# EAGLE board StepUp (EAGLE 6.5.0)
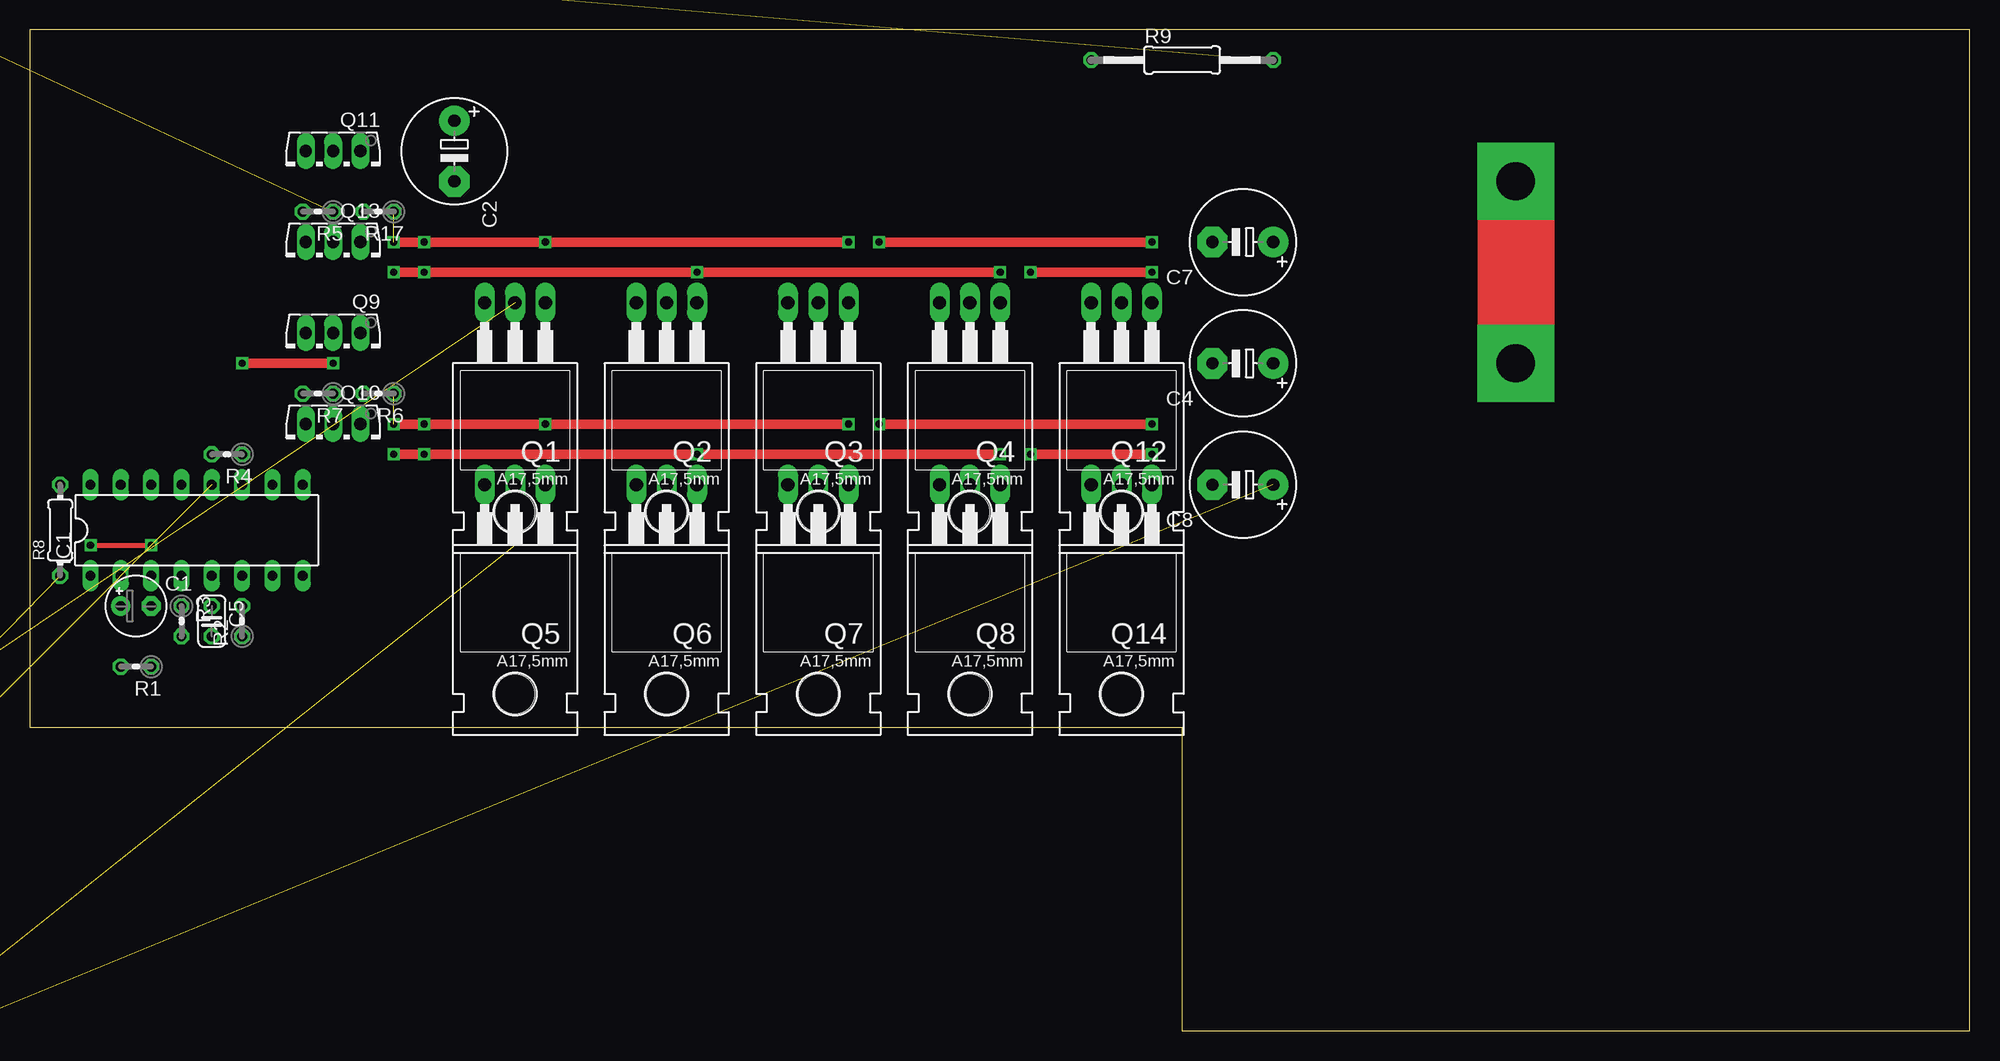
[diagram p0: board, top side]
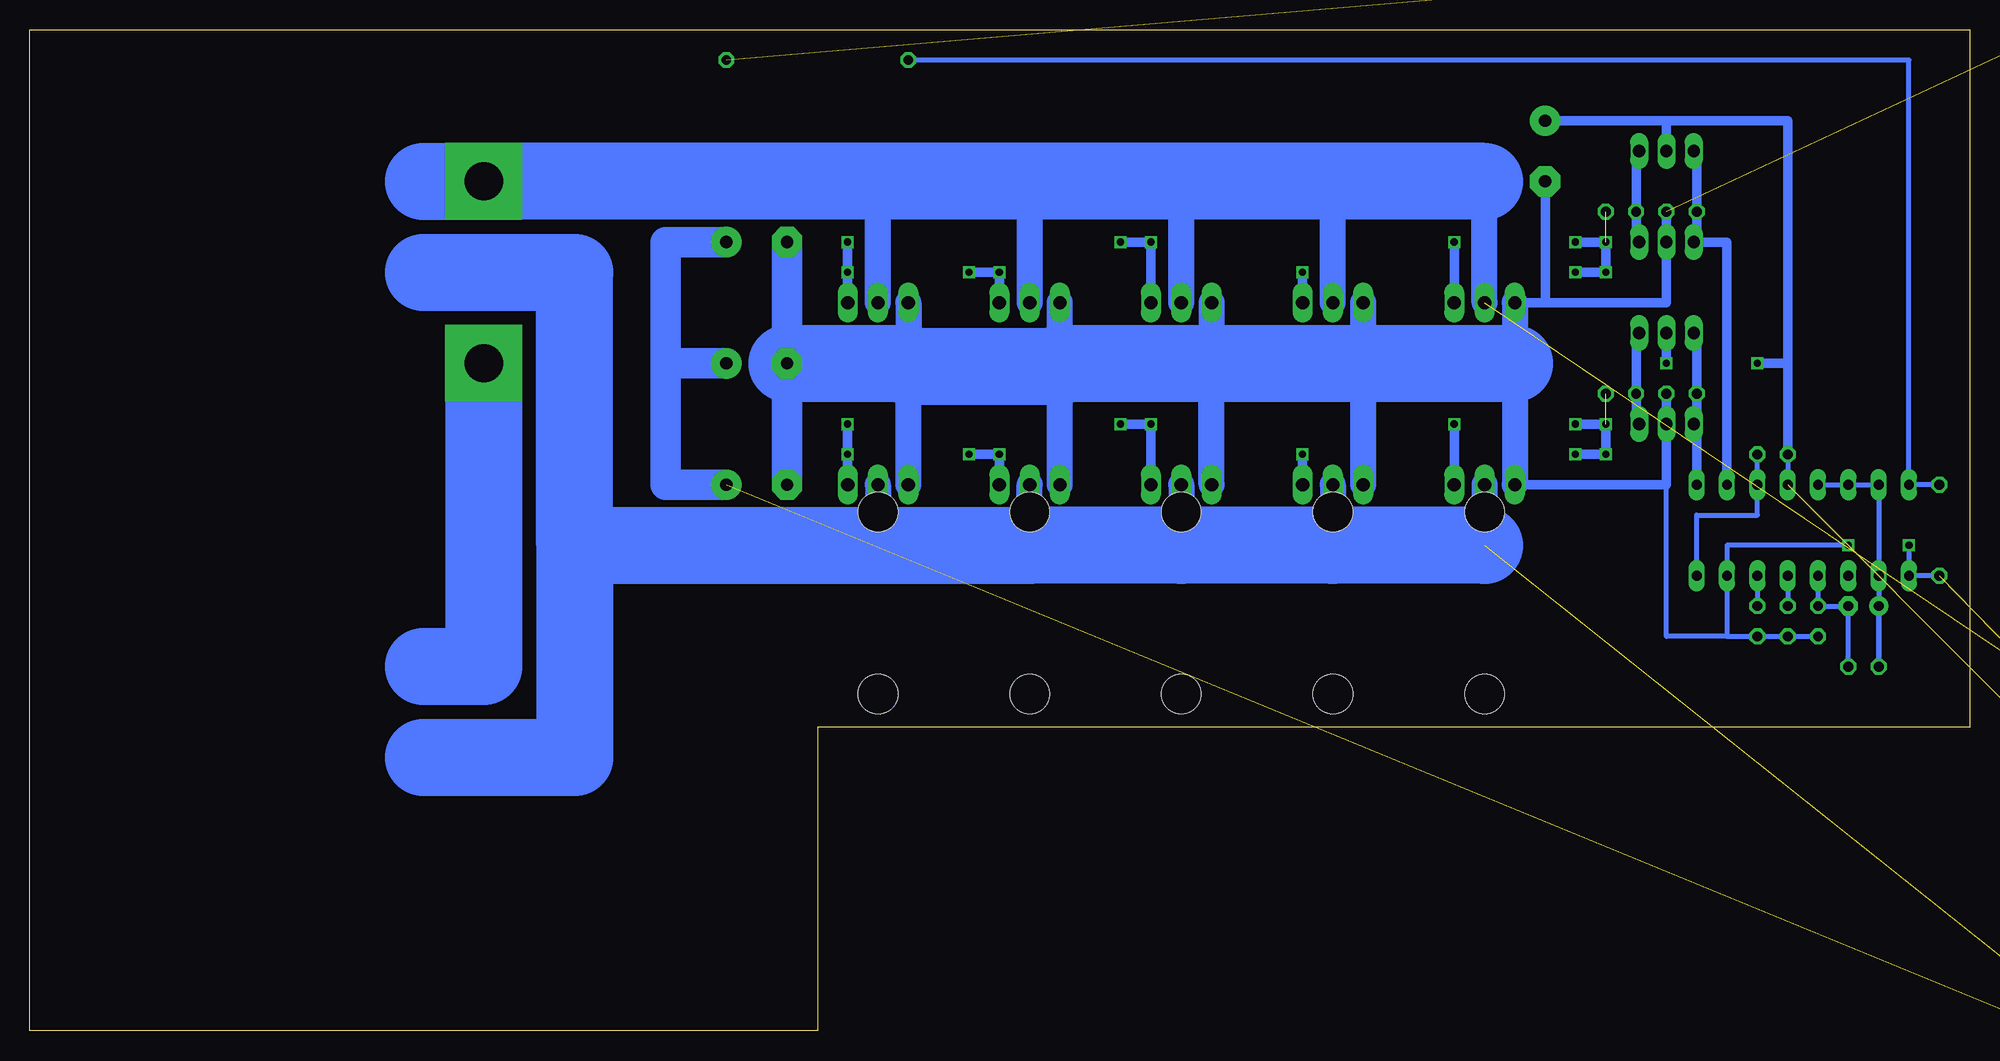
[diagram p1: board, bottom side, seen from below]

Size 162.48 x 83.81 mm. Coordinates in mm from the lower left corner, seen from the top.
Outline: 0,25.4 96.52,25.4 96.52,0 162.48,0 162.48,83.81 0,83.81 0,25.4
Copper layers (1*16): Top 0.035mm / dielectric 1.5mm / Bottom 0.035mm
Design rules "default": minimum track width 10mil, minimum drill 24mil, track to track 8mil, track to pad 8mil, pad to pad 8mil, via to via 8mil, smd to smd 8mil, copper to edge 40mil, drill to drill 8mil, minimum pad ring 10mil, minimum via ring 8mil, stop-mask expansion 4mil, vias tented up to drill 0mil, thermal gap 10mil

## Footprints (pad centres in the part's own frame; a part is rotated, then mirrored left to right if it is on the bottom)
E2,5-5 = drill 0.813 pad 1.6: + -1.27,0 | drill 0.813 pad 1.6 octagon: - 1.27,0
E5-8,5 = drill 1.016 pad 2.54: + -2.54,0 | drill 1.016 pad 2.54 octagon: - 2.54,0
E3,5-8 = drill 0.813 pad 1.6: + -1.778,0 | drill 0.813 pad 1.6 octagon: - 1.778,0
C025-024X044 = drill 0.813 octagon: 1 -1.27,0; 2 1.27,0
TO220ACS = drill 1.016 long: A 2.54,-2.54; C -2.54,-2.54
DIL16 = drill 0.813 long: 1 -8.89,-3.81; 2 -6.35,-3.81; 3 -3.81,-3.81; 4 -1.27,-3.81; 5 1.27,-3.81; 6 3.81,-3.81; 7 6.35,-3.81; 8 8.89,-3.81; 9 8.89,3.81; 10 6.35,3.81; 11 3.81,3.81; 12 1.27,3.81; 13 -1.27,3.81; 14 -3.81,3.81; 15 -6.35,3.81; 16 -8.89,3.81
6000-XXXX-RC = drill 0.9 pad 1.422: 1 -2.5,0; 2 2.5,0
TO220BH = drill 1.118 long: D 0,-6.35; G -2.54,-6.35; S 2.54,-6.35 | hole 3.302: 0,11.176
TO126AV = drill 1.016 long: B 2.286,-1.27; C 0,-1.27; E -2.286,-1.27
0204V = drill 0.813 octagon: 1 -1.27,0; 2 1.27,0
0204/7 = drill 0.813 octagon: 1 -3.81,0; 2 3.81,0
0207/15 = drill 0.813 octagon: 1 -7.62,0; 2 7.62,0
MA03-1 = drill 1.016 long: 1 -2.54,0; 2 0,0; 3 2.54,0
FL02-08 = drill 1.194 pad 3.175 octagon: 1 -17.501,17.501; 2 -17.501,7.518; 3 -17.501,-7.518; 4 -17.501,-17.501; 5 17.501,-17.501; 6 17.501,-12.497; 7 17.501,12.497; 8 17.501,17.501 | hole 4.115: 23.749,18.745; 23.749,-18.745; -23.749,-18.745; -23.749,18.745

## Placement (x,y rotation side)
C1  10µ  [E2,5-5]  8.89,35.56 0 top
C2  1000µ  [E5-8,5]  35.56,73.66 270 top
C3  [E3,5-8]  -27.94,92.71 0 top  (outside the outline)
C4  3300µ  [E5-8,5]  101.6,55.88 180 top
C5  1n  [C025-024X044]  15.24,34.29 270 top
C6  [E3,5-8]  -50.8,92.71 0 top  (outside the outline)
C7  3300µ  [E5-8,5]  101.6,66.04 180 top
C8  3300µ  [E5-8,5]  101.6,45.72 180 top
C9  [E3,5-8]  -85.09,92.71 0 top  (outside the outline)
D4  BYT08P  [TO220ACS]  -39.37,85.09 0 top  (outside the outline)
D5  BYT08P  [TO220ACS]  -50.8,85.09 0 top  (outside the outline)
D6  BYT08P  [TO220ACS]  -62.23,85.09 0 top  (outside the outline)
D7  BYT08P  [TO220ACS]  -73.66,85.09 0 top  (outside the outline)
IC1  TL494CN  [DIL16]  13.97,41.91 0 top
L2  10µ  [6000-XXXX-RC]  -93.98,-52.58 0 top  (outside the outline)
Q1  IRFZ48Z  [TO220BH]  40.64,54.61 180 top
Q2  IRFZ48Z  [TO220BH]  53.34,54.61 180 top
Q3  IRFZ48Z  [TO220BH]  66.04,54.61 180 top
Q4  IRFZ48Z  [TO220BH]  78.74,54.61 180 top
Q5  IRFZ48Z  [TO220BH]  40.64,39.37 180 top
Q6  IRFZ48Z  [TO220BH]  53.34,39.37 180 top
Q7  IRFZ48Z  [TO220BH]  66.04,39.37 180 top
Q8  IRFZ48Z  [TO220BH]  78.74,39.37 180 top
Q9  BD139  [TO126AV]  25.4,57.15 180 top
Q10  BD140  [TO126AV]  25.4,49.53 180 top
Q11  BD139  [TO126AV]  25.4,72.39 180 top
Q12  IRFZ48Z  [TO220BH]  91.44,54.61 180 top
Q13  BD140  [TO126AV]  25.4,64.77 180 top
Q14  IRFZ48Z  [TO220BH]  91.44,39.37 180 top
R1  6,8k  [0204V]  8.89,30.48 180 top
R2  16k  [0204V]  17.78,34.29 90 top
R3  750  [0204V]  12.7,34.29 270 top
R4  22  [0204V]  16.51,48.26 180 top
R5  470  [0204V]  24.13,68.58 180 top
R6  1  [0204V]  29.21,53.34 180 top
R7  470  [0204V]  24.13,53.34 180 top
R8  27k  [0204/7]  2.54,41.91 90 top
R9  1M6  [0207/15]  96.52,81.28 0 top
R17  1  [0204V]  29.21,68.58 180 top
SV2  [MA03-1]  -45.72,106.68 0 top  (outside the outline)
SV3  [MA03-1]  -93.22,-62.99 0 top  (outside the outline)
TR2  [FL02-08]  -61.47,-37.08 0 top  (outside the outline)

## Library data of the parts
C1-C9 L2 R1-R9 R17 = rcl
D4-D7 = diode
IC1 = linear
Q1-Q14 = transistor-power
SV2 SV3 = con-lstb; OC_FARNELL: unknown; OC_NEWARK: unknown
TR2 = trafo

## Nets
+12V: C2.+ IC1.12 Q9.C Q11.C R4.2 SV3.2
GND: C2.- C3.- C4.- C5.2 C6.- C7.- C8.- C9.- D6.A D7.A IC1.1 IC1.7 Q1.S Q2.S Q3.S Q4.S Q5.S Q6.S Q7.S Q8.S Q10.C Q12.S Q13.C Q14.S R2.1 R3.2 R5.1 R7.1 R8.1 SV2.2 SV2.3 SV3.1
N$1: L2.1 SV3.3
N$2: C5.1 IC1.5
N$3: C1.+ IC1.2 IC1.13 IC1.14 IC1.15 R1.2
N$4: IC1.16 R8.2 R9.1
N$5: C1.- IC1.4 R1.1 R3.1
N$6: IC1.6 R2.2
N$7: TR2.6 TR2.7
N$8: Q11.E Q13.E R17.2
N$9: Q1.G Q2.G Q3.G Q4.G Q12.G R17.1
N$11: IC1.8 IC1.11 R4.1
N$12: IC1.10 Q11.B Q13.B R5.2
N$13: Q5.G Q6.G Q7.G Q8.G Q14.G R6.1
N$16: Q9.E Q10.E R6.2
N$17: IC1.9 Q9.B Q10.B R7.2
N$20: D5.A D6.C TR2.8
N$21: D4.A D7.C TR2.5
N$27: Q5.D Q6.D Q7.D Q8.D Q14.D TR2.4
N$28: Q1.D Q2.D Q3.D Q4.D Q12.D TR2.1
N$33: C4.+ C7.+ C8.+ L2.2 TR2.2 TR2.3
V+: C3.+ C6.+ C9.+ D4.C D5.C R9.2 SV2.1

## Tracks (layer width: path | path; a pad name or v marks a point on that pad's centre or on a via)
+12V  (via drill 0.6)  (1 unrouted)
  Top 0.813: v25.4,55.88 v17.78,55.88
  Bottom 0.406: R4.2 IC1.12
  Bottom 0.813: Q11.C 25.4,76.2 | 25.4,76.2 15.24,76.2 15.24,55.88 | 15.24,55.88 R4.2 | Q9.C v25.4,55.88 | v17.78,55.88 15.24,55.88 | C2.+ 25.4,76.2
GND  (via drill 0.6)  (8 unrouted)
  Top 0.406: v5.08,40.64 v10.16,40.64
  Bottom 0.406: 20.32,33.02 IC1.7 20.32,40.64 v10.16,40.64 | 20.32,33.02 R2.1 C5.2 R3.2 | v5.08,40.64 IC1.1 R8.1 | 20.32,33.02 25.4,33.02 25.4,45.72
  Bottom 0.813: Q10.C R7.1 25.4,45.72 Q5.S | R5.1 Q13.C 25.4,60.96 35.56,60.96 | 35.56,60.96 Q1.S | C2.- 35.56,60.96
  Bottom 2.184: Q8.S 76.2,55.63 76.2,55.88 Q4.S | Q7.S 63.5,55.88 Q3.S | Q5.S 38.1,55.88 Q1.S | Q6.S 50.8,55.88 Q2.S | Q14.S 88.9,55.63 88.9,55.88 Q12.S
  Bottom 2.54: C7.- C4.- C8.-
  Bottom 6.452: 76.2,55.88 63.5,55.88 50.8,55.88 38.1,55.88 | 88.9,55.63 76.2,55.63 | C4.- 88.9,55.88
N$1  (1 unrouted)
N$2
  Bottom 0.406: IC1.5 C5.1
N$3
  Bottom 0.406: IC1.13 IC1.14 IC1.15 IC1.2 R1.2 C1.+
N$4
  Bottom 0.406: R8.2 IC1.16 5.08,81.28 R9.1
N$5
  Bottom 0.406: IC1.4 R3.1 C1.- R1.1
N$6
  Bottom 0.406: IC1.6 R2.2
N$7  (1 unrouted)
N$8
  Bottom 0.813: Q11.E 27.94,73.66 R17.2 27.94,66.04 Q13.E
N$9  (via drill 0.6)  (1 unrouted)
  Top 0.813: v43.18,66.04 v33.02,66.04 | v68.58,66.04 v30.48,66.04 | v81.28,63.5 v55.88,63.5 v33.02,63.5 v30.48,63.5 | v93.98,66.04 v71.12,66.04 | v93.98,63.5 v83.82,63.5
  Bottom 0.813: Q1.G v43.18,66.04 | Q2.G v55.88,63.5 | Q3.G v68.58,66.04 v71.12,66.04 | v33.02,66.04 v30.48,66.04 v30.48,63.5 v33.02,63.5 | Q4.G v81.28,63.5 v83.82,63.5 | v93.98,66.04 v93.98,63.5 Q12.G
N$11
  Bottom 0.406: IC1.8 22.86,43.18 17.78,43.18 IC1.11 R4.1
N$12
  Bottom 0.813: 22.86,66.04 R5.2 22.86,73.66 Q11.B | 22.86,66.04 Q13.B | 22.86,66.04 20.32,66.04 IC1.10
N$13  (via drill 0.6)  (1 unrouted)
  Top 0.813: v43.18,50.8 v33.02,50.8 | v55.88,48.26 v33.02,48.26 | v68.58,50.8 v30.48,50.8 | v81.28,48.26 v30.48,48.26 | v93.98,50.8 v71.12,50.8 | v93.98,48.26 v83.82,48.26
  Bottom 0.813: Q5.G v43.18,50.8 | Q6.G v55.88,48.26 | Q7.G v68.58,50.8 v71.12,50.8 | v33.02,50.8 v30.48,50.8 v30.48,48.26 v33.02,48.26 | Q8.G v81.28,48.26 v83.82,48.26 | v93.98,50.8 v93.98,48.26 Q14.G
N$16
  Bottom 0.813: Q10.E 27.94,50.8 R6.2 27.94,58.42 Q9.E
N$17
  Bottom 0.813: 22.86,50.8 R7.2 22.86,58.42 Q9.B | IC1.9 22.86,50.8 | Q10.B 22.86,50.8
N$20  (2 unrouted)
N$21  (2 unrouted)
N$27  (1 unrouted)
  Bottom 2.184: Q5.D 40.64,40.64 | 78.74,40.64 Q8.D | Q7.D 66.04,40.64 | Q6.D 53.34,40.64 | Q14.D 91.44,40.64
  Bottom 6.452: 40.64,40.64 53.34,40.64 66.04,40.64 78.74,40.64 91.44,40.64 116.84,40.64 | 116.84,40.64 116.84,63.5 129.54,63.5 | 116.84,40.64 116.84,22.86 129.54,22.86
N$28  (via drill 3.2 pad 6.45)  (1 unrouted)
  Top 6.452: v124.46,71.12 v124.46,55.88
  Bottom 2.184: Q1.D 40.64,71.12 | 78.74,71.12 Q4.D | Q3.D 66.04,71.12 | Q2.D 53.34,71.12 | Q12.D 91.44,71.12
  Bottom 6.452: 40.64,71.12 53.34,71.12 66.04,71.12 78.74,71.12 91.44,71.12 v124.46,71.12 129.54,71.12 | v124.46,55.88 124.46,30.48 129.54,30.48
N$33  (3 unrouted)
  Bottom 2.54: C7.+ 109.22,66.04 109.22,55.88 | 109.22,55.88 109.22,45.72 C8.+ | C4.+ 109.22,55.88
V+  (6 unrouted)